# Altium PCB InverterPCB.PcbDoc
Units mm, origin at the board's own origin, x right, y up, seen from the top; angles counter-clockwise.
Board outline 118.77 x 89.69 mm, 2 copper layers (Top Layer, Bottom Layer); 52 components, 27 nets, 177 pads, 46 vias.
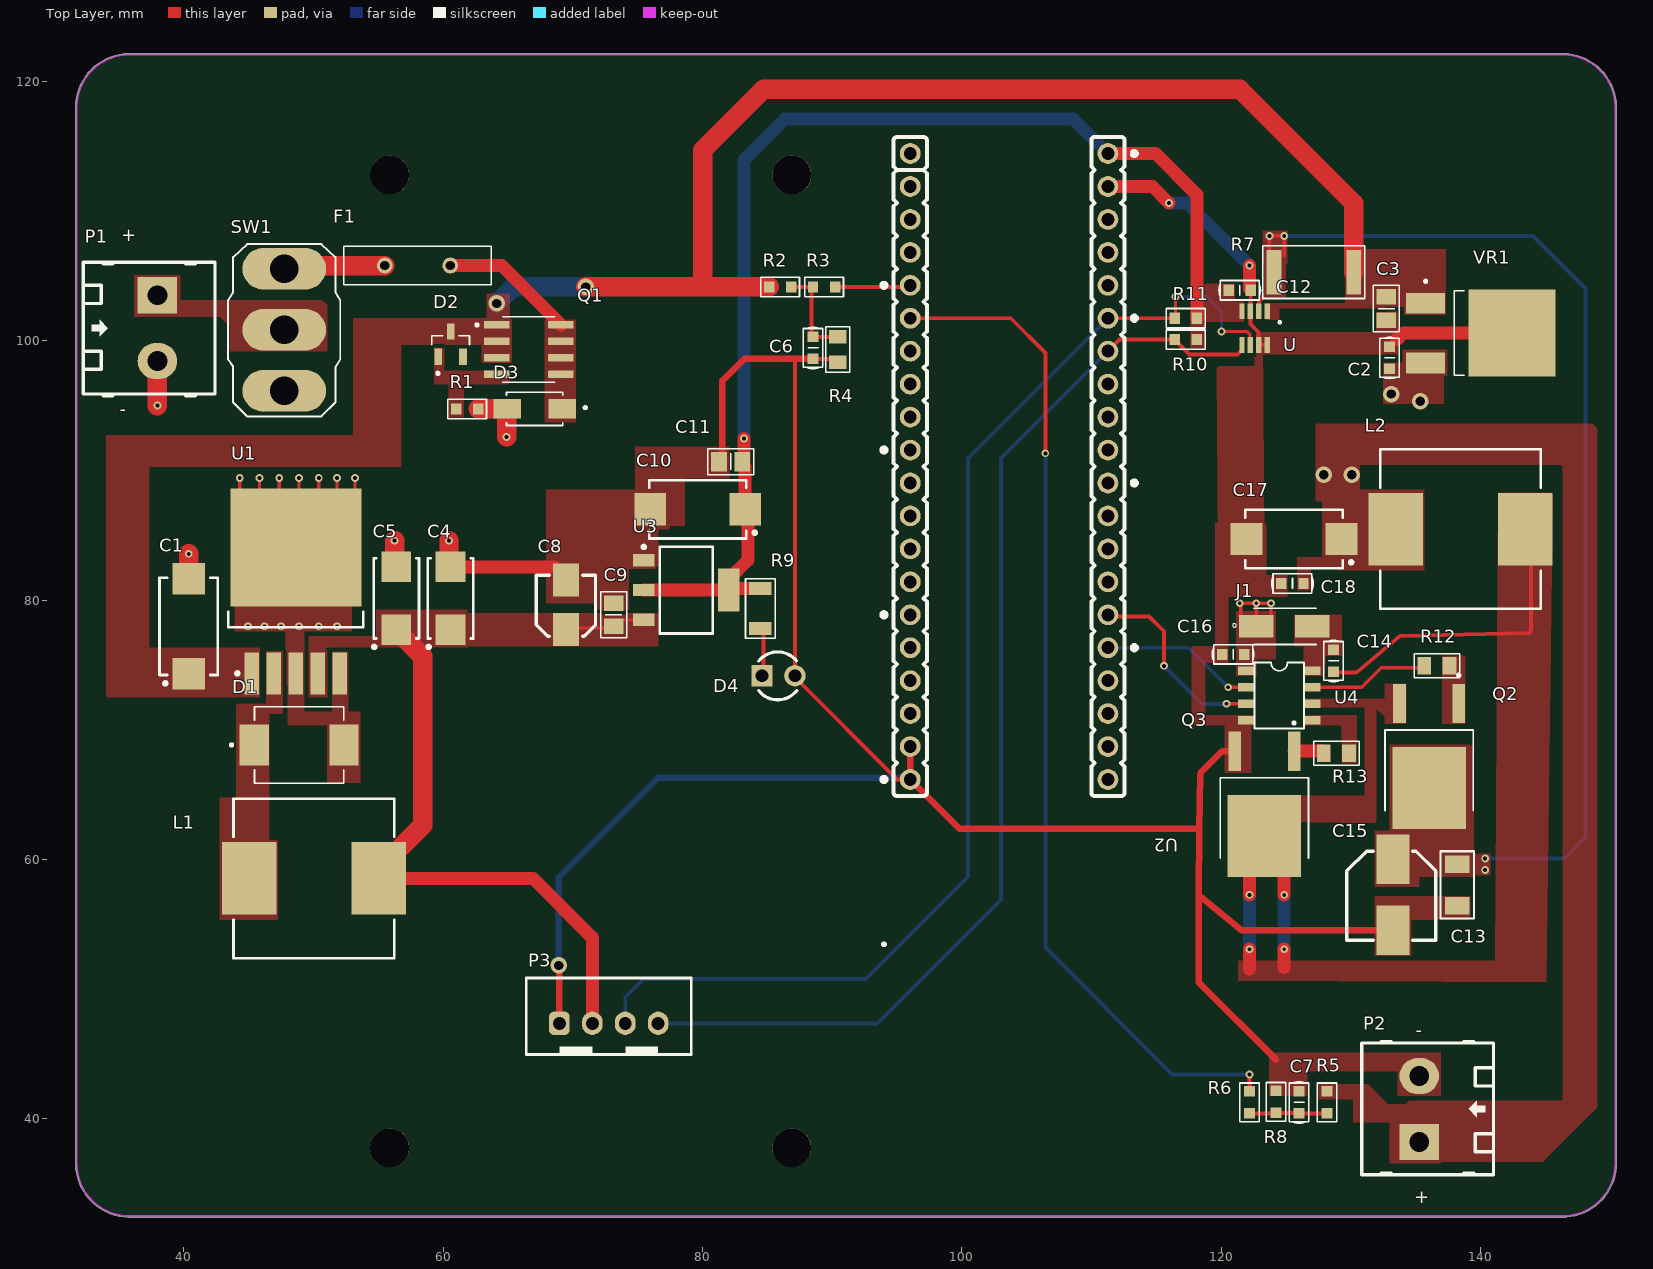
[diagram p0: Top Layer view]
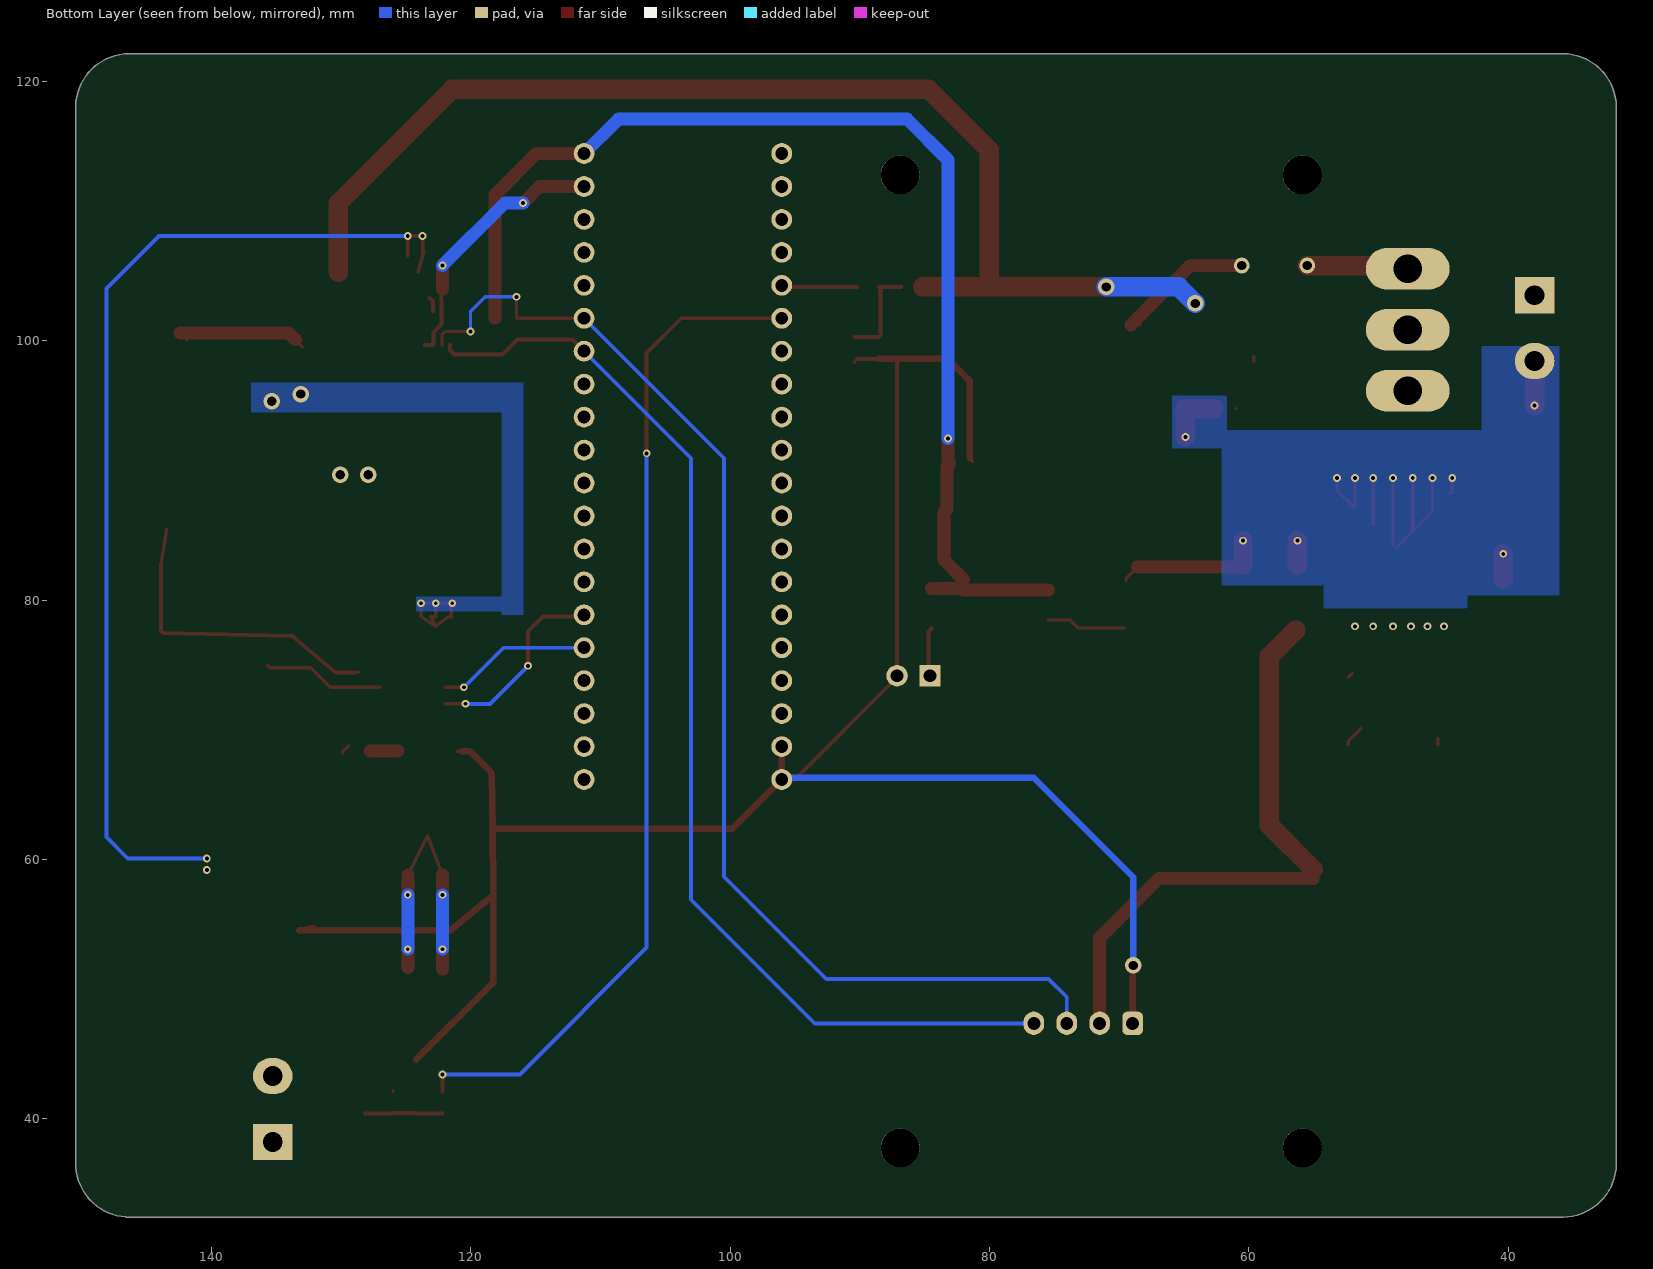
[diagram p1: Bottom Layer view, seen from below]

## Layer stack, top to bottom
Top Solder: solder mask 0.0102, Solder Resist, Dk 3.5
Top Layer: signal copper 0.0356
Dielectric 1: dielectric 0.32, FR-4, Dk 4.8
Bottom Layer: signal copper 0.0356
Bottom Solder: solder mask 0.0102, Solder Resist, Dk 3.5

## Board outline
31.675,36.576 31.675,118.047 31.675,118.048 cw(c35.814,117.983) 35.749,122.122 35.75,122.122 146.304,122.122 146.369,122.122 cw(c146.304,117.983) 150.443,118.048 150.443,117.983 150.443,36.322 150.434,36.285 cw(c146.304,36.576) 146.595,32.446 146.558,32.437 35.814,32.437 35.749,32.437 cw(c35.814,36.576)

## Design rules (kind name [scope] priority, off if disabled: settings)
Clearance [All] p1: gap=0.3 ignorepadtopadclearanceinfootprint=FALSE
PlaneClearance [All] p1: clearance=0.3
PlaneConnect [All] p1: planeconnectstyle=Direct reliefexpansion=0.508 reliefentries=4 reliefconductorwidth=0.254 reliefairgap=0.254
PolygonConnect [All] p1: connectstyle=Direct reliefconductorwidth=0.254 reliefentries=4 polygonreliefangle="90 Angle" airgapwidth=0.254
RoutingVias [All] p1: holewidth=0.711 width=1.27 viastyle="Through Hole" minholewidth=0.711 minwidth=1.27 maxholewidth=0.711 maxwidth=1.27
SolderMaskExpansion [All] p1: expansion=0.102 istentingtop=FALSE
SupplyNets "Schematic Supply Nets" [InNet('GND')] p1: voltage=0.000
Width [All] p1: maxlimit=0.254 minlimit=0.254 preferedwidth=0.254
28 further rules are at their usual default settings.

## Components (designator, comment, footprint, x,y, rotation, side; value= is the part's Value field where it differs from the comment)
C1 "100uF, 50v" "C SMD TAN 2917 (E)" 40.386,77.978 r90 top
C2 "100nF, 50v" "C 0603" 132.969,98.679 r270 top
C3 "0.33uF, 50v" "C 0805" 132.715,102.478 r270 top
C4 "220uF" "C SMD TAN 2312 (C)" 60.579,80.137 r90 top
C5 "220uF" "C SMD TAN 2312 (C)" 56.388,80.137 r90 top
C6 "100nF, 50v" "C 0603" 88.519,99.441 r90 top
C7 "100nF, 50v" "C 0603" 125.984,41.275 r270 top
C8 "10uF" "C SMD ALU (B)" 69.469,79.629 r90 top
C9 "100nF" "C 0805" 73.152,78.867 r90 top
C10 "22uF" "C SMD TAN 2917 (E)" 79.629,86.995 r180 top
C11 "100nF" "C 0805" 82.169,90.678 r180 top
C12 "100nF, 50v" "C 0603" 121.412,103.886 r0 top
C13 "2.2uF, 50v" "C 1206" 138.176,58.039 r90 top
C14 "1uF, 50v" "C 0603" 128.651,75.311 r90 top
C15 "470uF, 35V" "C SMD ALU (D8)" 133.223,57.277 r270 top
C16 "100nF, 50v" "C 0603" 120.904,75.819 r180 top
C17 "330uF, 16V" "C SMD TAN 2917 (E)" 125.603,84.709 r180 top
C18 "100nF, 50v" "C 0603" 125.476,81.28 r0 top
D1 "SS34" DIOM7959X265N 48.895,68.834 r0 top
D2 "BZX84-C12" SOT95P230X110-3N 60.579,99.731 r90 top
D3 "SMAJ28A" DIOM4325X250N 67.056,94.742 r180 top
D4 "Led" "LED 3MM - green" 85.852,74.168 r0 top
F1 "RUEF250" RUEF250 55.499,105.791 r0 top
J1 "SS14" SMA 124.7,77.978 r0 top
L1 "33uH 4.2A" "Inductor SMD 12x12x8" 50.038,58.547 r0 top
L2 "68uH" "Inductor SMD 12x12x8" 138.43,85.471 r180 top
P1 "Header 2" HDR/Terminal/2 37.973,100.965 r270 top
P2 "Header 2" HDR/Terminal/2 135.255,40.767 r90 top
P3 "LCD" HDR/Header/4/BOX 72.771,47.371 r0 top
Q1 "AO4407A" SOIC127P600X175-8N 66.61,99.314 r0 top
Q2 "AOD4184A" DPAK228P994X240-4N 136.017,67.945 r180 top
Q3 "AOD4184A" DPAK228P994X240-4N 123.317,64.262 r180 top
R1 "47k" "R 0603" 61.849,94.742 r180 top
R2 "100k" "R 0603" 85.979,104.14 r0 top
R3 "1k" "R 0603" 89.369,104.14 r0 top
R4 "10k" "R 0805" 90.424,99.314 r270 top
R5 "100k" "R 0603" 128.143,41.275 r270 top
R6 "1k" "R 0603" 122.174,41.275 r90 top
R7 "50mR" "R 2512" 127.127,105.283 r0 top
R8 "10k" "R 0603" 124.206,41.314 r90 top
R9 "4.7k" "R 1206" 84.455,79.349 r90 top
R10 "4.7k" "R 0603" 117.26,100.076 r180 top
R11 "4.7k" "R 0603" 117.26,101.727 r180 top
R12 "10R" "R 0805" 136.611,74.93 r0 top
R13 "10R" "R 0805" 128.864,68.199 r180 top
SW1 "MTS-102" MTS-102 47.752,100.838 r0 top
U "INA219" SOT23-8 122.555,100.965 r180 top
U1 "LM2596S-5.0" TO-263-5 48.641,80.645 r90 top
U2 "STM32F103C8T6 BLUEPILL" "Female header 20x20 pin" 103.632,90.297 r270 top value="Connector 9"
U3 "AMS1117" SOT-223 78.74,80.772 r0 top
U4 "IR2104S" IR2104S 121.92,70.739 r0 top
VR1 "L78M12ABDT" VREG_L78M12ABDT 139.988,100.584 r0 top

## Footprints (in the part's own frame and the unit in brackets; to place one, negate y for a bottom-side part, rotate by r counter-clockwise, add the part's x,y. Pads: shape width x height; smd on the part's side, far side on the other; paste and mask are expansions set on the pad)
"C 0603" [mm] "Chip Capacitor, 2-Leads, Body 1.6x0.8mm, IPC Medium Density"
  rect 0.8x0.85 smd: 1(-0.85,0) 2(0.85,0)
  silkscreen extent -1.6,-0.75 1.6,0.75, body extent -0.8,-0.43 0.8,0.43, height 0.81
"C 0805" [mm] "Chip Capacitor, 2-Leads, Body 2.0x1.3mm, IPC Medium Density"
  rect 1.2x1.5 smd: 1(-0.9,0) 2(0.9,0)
  silkscreen extent -1.78,-1 1.78,1, body extent -1,-0.64 1,0.61, height 0.6
"C 1206" [mm]
  rect 1.35x1.9 smd: 1(-1.6,0) 2(1.6,0)
  silkscreen extent -2.6,-1.3 2.6,1.3, body extent -1.6,-0.8 1.6,0.8, height 0.6
"C SMD ALU (B)" [mil] "SMD Aluminum Electrolytic Capacitor, size D (4.0 x 5.4 mm)"
  rect 100x80 smd: 1(-75,0) 2(75,0)
  silkscreen extent -95,-90 90,90, body extent -91,-85 91,85, height 213
"C SMD ALU (D8)" [mil] "SMD Aluminum Electrolytic Capacitor, size D8 (6.3 x 7.7 mm)"
  rect 150x100 smd: 1(-107.5,0) 2(107.5,0)
  silkscreen extent -132,-140 138,130, body extent -138,-135 138,125, height 303
"C SMD TAN 2312 (C)" [mm] "Molded Capacitor, 2-Leads, Body 6.0x3.2mm, IPC Medium Density"
  rect 2.35x2.3 smd: 1(-2.425,0) 2(2.425,0)
  silkscreen extent -3.87,-1.75 3.1,1.82, body extent -3.09,-1.58 3.09,1.63, height 2.68
"C SMD TAN 2917 (E)" [mm] "Molded Capacitor, 2-Leads, Body 7.3x4.3mm, IPC Medium Density"
  rect 2.45x2.5 smd: 1(-3.66,0) 2(3.66,0)
  silkscreen extent -4.52,-2.25 3.75,2.25, body extent -4.5,-2.3 4.5,2.31, height 3.1
DIOM4325X250N [mm]
  rect 2.12x1.5 smd: A(2.115,0) C(-2.115,0)
  silkscreen extent -4,-1.28 2.16,1.28, body extent -2.57,-1.28 2.57,1.28, height 2.5
DIOM7959X265N [mm]
  rect 2.25x3.18 smd paste+0 mask+0.102: A(3.455,0) C(-3.455,0)
  silkscreen extent -5.3,-2.95 3.44,2.95, body extent 1.05,-3 8.95,2.8, height 2.58
DPAK228P994X240-4N [mm]
  rect 0.97x3.02 smd: 1(-2.286,-4.09) 3(2.286,-4.09)
  rect 5.67x6.32 smd paste-4: 4(0,2.44)
  silkscreen extent -3.4,-6.36 3.4,4.18, body extent -3.3,-5.02 3.3,5.02, height 2.4
"Female header 20x20 pin" [mm] "Connector DIP Male, 9Pin_2.54mm"
  round 1.6 hole 1 mask+0.1: 1(-24.13,-7.62) 2(-21.59,-7.62) 3(-19.05,-7.62) 4(-16.51,-7.62) 5(-13.97,-7.62) 6(-11.43,-7.62) 7(-8.89,-7.62) 8(-6.35,-7.62) 9(-3.81,-7.62) 10(-1.27,-7.62) 11(1.27,-7.62) 12(3.81,-7.62) 13(6.35,-7.62) 14(8.89,-7.62) 15(11.43,-7.62) 16(13.97,-7.62) 17(16.51,-7.62) 18(19.05,-7.62) 19(21.59,-7.62) 20(24.13,-7.62) 21(24.13,7.62) 22(21.59,7.62) 23(19.05,7.62) 24(16.51,7.62) 25(13.97,7.62) 26(11.43,7.62) 27(8.89,7.62) 28(6.35,7.62) 29(3.81,7.62) 30(1.27,7.62) 31(-1.27,7.62) 32(-3.81,7.62) 33(-6.35,7.62) 34(-8.89,7.62) 35(-11.43,7.62) 36(-13.97,7.62) 37(-16.51,7.62) 38(-19.05,7.62) 39(-21.59,7.62) 40(-24.13,7.62)
  silkscreen extent -25.4,-9.75 36.93,9.75, body extent -30.73,-11.63 27.07,11.37, height 20.1
HDR/Header/4/BOX [mm]
  rrect50% 1.6x1.8 hole 1: 1(-3.81,0)
  oval 1.6x1.8 hole 1: 2(-1.27,0) 3(1.27,0) 4(3.81,0)
  silkscreen extent -6.35,-2.41 6.35,3.5, body extent -6.25,-2.3 6.25,3.4, height 7
HDR/Terminal/2 [mil] "Header 2, 2 pin, hight 400mil, Pin to Pin 200mil, Colour Green"
  rect 110x120 hole 60: 1(-100,0)
  oval 110x120 hole 60: 2(100,0)
  silkscreen extent -200,-225 205,175, body extent -229,-218 200,168, height 559
"Inductor SMD 12x12x8" [mm] "Precision Wire Wound Inductor, 2-Leads, Body 12.3x12.3mm, IPC Low Density"
  rect 4.2x5.6 smd: 1(-5,0) 2(5,0)
  silkscreen extent -6.2,-6.15 6.2,6.15, body extent -6.25,-6.25 6.25,6.25, height 8.01
IR2104S [mm]
  rect 1.27x0.635 smd: 1(0,3.81) 2(0,2.54) 3(0,1.27) 4(0,0) 5(5.08,0) 6(5.08,1.27) 7(5.08,2.54) 8(5.08,3.81)
  silkscreen extent 0.64,-0.64 4.44,4.44
"LED 3MM - green" [mil]
  rect 65x65 hole 39: 1(-50,0)
  round 65 hole 39: 2(50,0)
  silkscreen extent -60,-73 55,72, body extent -66,-65 64,65, height 207
MTS-102 [mm]
  oval 6.432x3.216 hole 2.2: 1(0,4.7) 2(0,0) 3(0,-4.7)
  silkscreen extent -4.32,-6.68 4.32,6.6
"R 0603" [mm] "Chip Resistor, 2-Leads, Body 1.6x0.8mm, IPC Medium Density"
  rect 0.8x0.85 smd: 1(-0.85,0) 2(0.85,0)
  silkscreen extent -1.5,-0.75 1.5,0.75, body extent -0.8,-0.4 0.8,0.4, height 0.5
"R 0805" [mm] "Chip Resistor, 2-Leads, Body 2.0x1.3mm, IPC Medium Density"
  rect 1.05x1.35 smd: 1(-0.975,0) 2(0.975,0)
  silkscreen extent -1.75,-0.92 1.75,0.92, body extent -1,-0.61 1,0.59, height 0.5
"R 1206" [mm] "Chip Resistor, 2-Leads, Body 3.1x1.6mm, IPC Medium Density"
  rect 1x1.75 smd: 1(-1.55,0) 2(1.55,0)
  silkscreen extent -2.29,-1.14 2.29,1.14, body extent -1.6,-0.8 1.6,0.8, height 0.6
"R 2512" [mm] "Chip Resistor, 2-Leads, Body 6.4x3.2mm, IPC Medium Density"
  rect 1.15x3.45 smd: 1(-3.075,0) 2(3.075,0)
  silkscreen extent -3.94,-2.03 3.94,2.03, body extent -3.2,-1.6 3.2,1.6, height 0.76
RUEF250 [mm]
  round 1.217 hole 0.71: 1(0,0) 2(5.05,0)
  silkscreen extent -3.17,-1.5 8.23,1.5
SMA [mm]
  rect 2.65x1.75 smd paste+0 mask+0.102: P1(-2,0) P2(2.3,0)
  silkscreen extent -3.84,-1.4 2.6,1.4, body extent -2.6,-1.36 2.6,1.36, height 2.5
SOIC127P600X175-8N [mm]
  rrect25% 1.97x0.6 smd: 1(-2.475,1.905) 2(-2.475,0.635) 3(-2.475,-0.635) 4(-2.475,-1.905) 5(2.475,-1.905) 6(2.475,-0.635) 7(2.475,0.635) 8(2.475,1.905)
  silkscreen extent -4.1,-2.52 2,2.52, body extent -3,-2.45 3,2.45, height 1.75
SOT23-8 [mm]
  rect 0.4x1.2 smd: 1(-0.975,-1.3) 2(-0.325,-1.3) 3(0.325,-1.3) 4(0.975,-1.3) 5(0.975,1.3) 6(0.325,1.3) 7(-0.325,1.3) 8(-0.975,1.3)
  silkscreen extent -2.05,-0.55 -1.85,-0.35
SOT95P230X110-3N [mm]
  rect 1.26x0.59 smd: 1(-0.98,0.95) 2(-0.98,-0.95) 3(0.98,0)
  silkscreen extent -2.35,-1.45 0.65,1.45
SOT-223 [mm] "SOT223, 4-Leads, Body 6.7x7.3mm (max), Pitch 2.30mm, IPC Medium Density"
  rect 1.65x0.95 smd: 1(-3.275,2.3) 2(-3.275,0) 3(-3.275,-2.3)
  rect 1.65x3.3 smd: 4(3.275,0)
  silkscreen extent -3.4,-3.35 2.05,3.45, body extent -3.5,-3.25 3.5,3.25, height 1.64
TO-263-5 [mm] "D2-PAK, 6-Pads, Body 8.9x10.4mm (max), IPC Medium Density"
  rect 3.25x1.1 smd: 1(-6.3,3.4) 2(-6.3,1.7) 3(-6.3,0) 4(-6.3,-1.7) 5(-6.3,-3.4)
  rect 9.1x10.1 smd: 6(3.4,0)
  silkscreen extent -6.42,-5.2 -1.55,5.2, body extent -7.56,-4.98 8.11,5.02, height 4.83
VREG_L78M12ABDT [mm]
  rect 3x1.6 smd: 1(-4.25,2.3) 3(-4.25,-2.3)
  rect 6.7x6.7 smd paste-2.645: 2(2.4,0)
  silkscreen extent -4.35,-3.25 -1.26,4.1, body extent -4.86,-3.25 4.86,3.25, height 2.4

## Part data
C1 C4 C5 C8 C10 C15 C17: library part Capacitor, "Capacitor pol"
C2 C3 C6 C7 C9 C11 C12 C13 C14 C16 C18: library part "Capacitor NP", "Capacitor non-pol"
D1: "Diode Schottky 40 V 3A Surface Mount SMC (DO-214AB)", PACKAGE="SMC-2 ON Semiconductor", Check_prices=https://www.snapeda.com/parts/SS34/Onsemi/view-part/?ref=eda, MF=onsemi, MP=SS34, SnapEDA_Link=https://www.snapeda.com/parts/SS34/Onsemi/view-part/?ref=snap
D2: "Zener Diode 12 V 250 mW Â±5% Surface Mount TO-236AB", PACKAGE="SOT-23 NXP Semiconductors", Check_prices=https://www.snapeda.com/parts/BZX84-C12/Nexperia/view-part/?ref=eda, MF="Nexperia USA", MP=BZX84-C12, SnapEDA_Link=https://www.snapeda.com/parts/BZX84-C12/Nexperia/view-part/?ref=snap
D3: "400W, 32.8V, 5%, Unidirectional, TVS", PACKAGE="SMA-2 Taiwan Semiconductor", Check_prices=https://www.snapeda.com/parts/SMAJ28A/taiwan/view-part/?ref=eda, MF="Taiwan Semiconductor", MP=SMAJ28A, SnapEDA_Link=https://www.snapeda.com/parts/SMAJ28A/taiwan/view-part/?ref=snap
D4: "Typical LED"
F1: "Littelfuse 2.5A Radial Leaded PCB Mount Resettable Fuse, 30V dc", Manufacturer_Name=LITTELFUSE, Mouser Part Number=650-RUEF250, Arrow Part Number=RUEF250, Arrow Price/Stock=https://www.arrow.com/en/products/ruef250/littelfuse?utm_currency=USD&region=europe, Datasheet Link=https://www.littelfuse.com/~/media/electronics/product_specifications/resettable_ptcs/littelfuse_ptc_ruef250_product_specification.pdf.pdf, Geometry.Height=18.3mm, Manufacturer_Part_Number=RUEF250, Mouser Price/Stock=https://www.mouser.co.uk/ProductDetail/Littelfuse/RUEF250?qs=hv6pn79dJPQsHwuAgSfH9w%3D%3D
J1: "Diode Schottky 40 V 1A Surface Mount DO-214AC (SMA)", PACKAGE="SMA-2 ON Semiconductor", Check_prices=https://www.snapeda.com/parts/SS14/Onsemi/view-part/?ref=eda, MF=ON, MP=SS14, SnapEDA_Link=https://www.snapeda.com/parts/SS14/Onsemi/view-part/?ref=snap
L1 L2: library part Inductor, "Inductor"
P1 P2: "Header, 2-Pin"
P3: library part "Header 4", "Header, 4-Pin"
Q1: "P-Channel 30 V 12A (Ta) 3.1W (Ta) Surface Mount 8-SOIC", PACKAGE="SOIC-8 Alpha &amp; Omega Semiconductor", Check_prices=https://www.snapeda.com/parts/AO4407A/Alpha/view-part/?ref=eda, MF="Alpha &", MP=AO4407A, SnapEDA_Link=https://www.snapeda.com/parts/AO4407A/Alpha/view-part/?ref=snap
Q2 Q3: "N-Channel 40 V 13A (Ta), 50A (Tc) 2.3W (Ta), 50W (Tc) Surface Mount TO-252 (DPAK)", PACKAGE=None, Check_prices=https://www.snapeda.com/parts/AOD4184A/Alpha+%2526+Omega+Semiconductor+Inc./view-part/?ref=eda, MF="Alpha & Omega Semiconductor Inc.", MP=AOD4184A, SnapEDA_Link=https://www.snapeda.com/parts/AOD4184A/Alpha+%2526+Omega+Semiconductor+Inc./view-part/?ref=snap
R1 R2 R3 R4 R5 R6 R7 R8 R9 R10 R11 R12 R13: library part Resistor, "Resistor"
SW1: "Rectangular Cable Assemblies .100 Mini Mate Single Row Discrete Wire Cable Assembly, Terminal", PACKAGE=None, Availability=Unavailable, Check_prices=https://www.snapeda.com/parts/MTS102/Motorola/view-part/698799/?ref=eda, MF=Motorola, MP=MTS102, Price=None, SnapEDA_Link=https://www.snapeda.com/parts/MTS102/Motorola/view-part/698799/?ref=snap
U: "Current Monitor Regulator High-Side 10mA SOT-23-8", PACKAGE="SOT-23-8 Texas Instruments", Availability=Unavailable, MF="Texas Instruments", MP=INA219, Price=None, SnapEDA_Link=https://www.snapeda.com/parts/INA219/Texas%20Instruments/view-part/564410/?ref=snap
U1: "Simple Switcher 3A Step-Down Voltage Regulator"
U2: library part "STM32F103C8T6 KIT BLUE PILL", "Connector 9"
U3: "1A LDO Voltage Regulator, ADJ or fixed 1.5/1.8/2.5/2.85/3.3/5V"
U4: "Half-Bridge Gate Driver IC Non-Inverting 8-SOIC", PACKAGE="SO-8 Infineon", Availability=Unavailable, MF="Infineon Technologies", MP=IR2104S, Price=None, SnapEDA_Link=https://www.snapeda.com/parts/IR2104S/Infineon%20Technologies/view-part/582439/?ref=snap
VR1: "Linear Voltage Regulator IC Positive Fixed 1 Output 500mA DPAK", PACKAGE="TO-252 STMicroelectronics", Availability="Not in stock", Check_prices=https://www.snapeda.com/parts/L78M12ABDT/STMicroelectronics/view-part/?ref=eda, MF=STMicroelectronics, MP=L78M12ABDT, Price=None, SnapEDA_Link=https://www.snapeda.com/parts/L78M12ABDT/STMicroelectronics/view-part/?ref=snap

## Free pads (board coordinates)
  round 3 hole 3 unplated mask+0.07: 2(55.88,37.776) 2(55.88,112.776) 2(86.88,37.776) 2(86.88,112.776)

## Via types
v1: diameter 0.6, hole 0.3, Top Layer to Bottom Layer, 39 vias
v2: diameter 1.27, hole 0.711, Top Layer to Bottom Layer, 7 vias

## Nets (pads, with @x,y where several pads share a name; then routed paths per layer and width w, separated by ;. In a path a pad name is that pad's centre, name@x,y a point inside that pad or via, vN(x,y) a via of type N, cw(c..) or ccw(c..) an arc to the next point about the centre after c; other vN are vias at no path point)
3.3V: C10.1 C11.1 C12.1 R9.2 R10.1 R11.1 U2.40 U3.2 U3.4 U.4 | length 91.1
  Top Layer w0.254: U3.4 U3.4@82.015,81.597 ; C11.1 C11.1@83.185,90.794
  Top Layer w1: U3.2 U3.4 82.142,80.899 R9.2 ; U3.4@82.015,81.597 83.509,83.091 83.509,86.775 C10.1 83.289,90.308 C11.1@83.069,90.528 ; C11.1@83.185,90.794 v1(83.185,92.456) ; U2.40 114.935,114.427 118.11,111.252 R11.1
  Bottom Layer w1: v1(83.185,92.456) 83.185,113.919 86.36,117.094 108.585,117.094 U2.40
5V: C4.1 C5.1 C8.1 C9.1 L1.2 P3.2 U1.4 U3.3 | length 51.8
  Top Layer w0.254: C5.1@56.388,77.687 C5.1 ; C8.1@69.596,77.851 73.186,77.851 73.807,78.472 U3.3
  Top Layer w1: L1.2 66.929,58.547 71.501,53.975 P3.2
  Top Layer w1.5: L1.2@55.038,59.247 58.42,62.629 58.42,75.655 C5.1@56.388,77.687
12V: C2.2 C16.1 J1.P1 U4.1 VR1.3 | length 9.5
  Top Layer w0.254: v1(122.682,79.756) 122.682,78.726 123.063,78.726 J1.P1 ; v1(122.682,79.756) v1(121.412,79.756) 121.412,79.662 121.502,79.572 121.502,78.726 121.666,78.726 J1.P1 ; v1(122.682,79.756) v1(123.825,79.756) 123.825,78.726 J1.P1
  other v2: 135.33,95.325 133.096,95.885
Batt: C17.1 C18.2 L2.2 P2.1 R5.1 | length 0.1
  Top Layer w0.254: P2.1@135.128,38.227 P2.1
  other v2: 127.889,89.662 130.048,89.662
GND: C1.2 C2.1 C3.2 C4.2 C5.2 C6.1 C7.1 C8.2 C9.2 C10.2 C11.2 C12.2 C13.1 C15.2 C16.2 C17.2 C18.1 D1.A D3.A D4.2 P1.2 P2.2 P3.1 Q3.3 R1.1 R4.2 R8.2 U1.3 U1.5 U1.6 U2.19 U2.20 U2.39 U3.1 U4.4 U.3 U.7 U.8 VR1.2 | length 248.9
  Top Layer w0.254: v1(44.323,89.408) 44.323,88.363 U1.6@44.499,88.187 ; v1(45.847,89.408) 45.847,86.839 U1.6 47.371,85.315 v1(47.371,89.408) ; U1.6@48.895,84.299 v1(48.895,89.408) ; U1.6@50.419,85.823 v1(50.419,89.408) ; D1.A@51.352,70.104 52.35,69.106 D1.A ; U1.6@51.816,87.22 v1(51.816,89.408) ; U1.6@51.891,87.146 53.213,88.468 v1(53.213,89.408) ; U1.5 U1.5@52.35,74.036 ; C5.2@56.261,82.689 C5.2 ; C8.2@68.58,82.562 69.469,81.673 C8.2 ; v2(68.915,51.834) v2@68.961,51.788 ; C11.2 C11.2@81.534,90.943 ; R4.2@90.172,98.591 R4.2 ; 118.363,66.573 cw(c118.617,66.568) 118.436,66.747 ; 119.943,68.254 cw(c120.123,68.075) 120.123,68.329 ; Q3.3@120.673,68.329 Q3.3 ; C12.2@122.174,103.974 C12.2 ; U.7@122.862,99.683 U.7 ; C7.1@125.945,42.164 C7.1 ; C15.2@132.08,54.864 C15.2 ; C2.1 132.994,99.529 133.267,99.802 133.267,99.827 133.516,100.076 ; VR1.2@141.88,100.076 VR1.2
  Top Layer w0.3: D4.2 87.122,98.591 ; D4.2@87.266,73.897 94.996,66.167 U2.20 ; C6.1 R4.2@90.172,98.591 ; U.3 122.23,101.278 122.862,100.646 U.7@122.862,99.683 ; U.3@122.253,102.288 122.253,103.071 122.262,103.08 C12.2 ; U.7 U.8
  Top Layer w0.5: P3.1 v2@68.961,51.788 ; C11.2@81.534,90.943 81.534,96.901 83.224,98.591 87.122,98.591 C6.1 ; U2.19 U2.20 99.823,62.356 118.306,62.356 ; 118.331,57.199 121.542,54.546 C15.2 ; 118.363,66.572 118.306,62.356 ; 118.436,66.747 119.943,68.254 ; 120.123,68.329 Q3.3@120.673,68.329 ; 124.206,44.577 118.239,50.544 118.239,57.399 118.306,62.356
  Top Layer w1: C4.2 C8.2@68.58,82.562 ; U2.39 114.681,111.887 v1(115.951,110.617) ; C12.2@122.174,103.974 v1(122.174,105.791) ; 133.516,100.076 134.024,100.584 VR1.2
  Top Layer w1.5: v1(37.973,94.996) P1.2 ; C1.2 v1(40.386,83.566) ; C5.2@56.261,82.689 v1(56.261,84.582) ; C4.2@60.452,82.689 v1(60.452,84.582) ; R1.1 D3.A ; v1(64.897,92.583) D3.A@64.897,94.698
  Bottom Layer w0.5: v2(68.915,51.834) 68.915,58.628 76.581,66.294 U2.20@95.885,66.294
  Bottom Layer w1: v1(115.951,110.617) 117.348,110.617 v1(122.174,105.791)
  other v1: 44.958,77.978 46.228,77.978 47.498,77.978 48.895,77.978 50.419,77.978 51.816,77.978
NetC6_2: C6.2 R2.2 R3.1 R4.1 | length 7.6
  Top Layer w0.3: R2.2 88.392,104.14 R3.1 88.392,104.013 88.392,100.418 88.521,100.289 R4.1
NetC7_2: C7.2 R5.2 R6.1 R8.1 | length 6
  Top Layer w0.254: R8.1@124.167,40.425 R8.1 ; C7.2@125.945,40.464 C7.2
  Top Layer w0.3: R6.1 R8.1@124.167,40.425 ; R8.1 C7.2@125.945,40.464 ; C7.2 R5.2
NetC14_1: C14.1 L2.1 Q2.3 Q3.4 U4.6 | length 45.1
  Top Layer w0.254: Q3.4@122.174,58.789 Q3.4 Q3.4@124.841,58.789 ; C14.1 C14.1@128.949,74.422 ; 130.336,74.422 ccw(c130.336,74.676) 130.5,74.482 ; 133.663,77.159 cw(c133.827,76.964) 133.82,77.218 ; L2.1 L2.1@143.876,82.798
  Top Layer w0.3: C14.1@128.949,74.422 130.336,74.422 ; 130.5,74.482 133.663,77.158 ; 133.82,77.218 143.629,77.463 ; 143.63,77.463 ccw(c143.622,77.717) 143.876,77.717 L2.1@143.876,82.798
  Top Layer w1: 122.174,51.562 v1(122.174,53.086) ; v1(122.174,57.277) Q3.4@122.174,58.789 ; 124.841,51.689 v1(124.841,53.086) ; v1(124.841,57.277) Q3.4@124.841,58.789
  Bottom Layer w1: v1(122.174,53.086) v1(122.174,57.277) ; v1(124.841,53.086) v1(124.841,57.277)
NetC14_2: C14.2 J1.P2 U4.8
NetD1_C: D1.C L1.1 U1.2 | length 0.5
  Top Layer w0.254: D1.C D1.C@45.44,69.299
NetD2_1: D2.1 Q1.4 R1.2 | length 0.4
  Top Layer w0.254: D2.1@59.629,98.416 D2.1 ; R1.2 R1.2@60.999,94.767
NetD3_C: D3.C F1.2 Q1.5 Q1.6 Q1.7 Q1.8 | length 11.1
  Top Layer w0.254: Q1.8@68.4,101.219 Q1.8
  Top Layer w1: F1.2 64.513,105.791 Q1.8
NetD4_1: D4.1 R9.1 | length 3.4
  Top Layer w0.3: R9.1 84.709,77.545 D4.1@84.709,74.549
NetF1_1: F1.1 SW1.1 | length 7.9
  Top Layer w1.5: SW1.1 48.005,105.791 F1.1
NetQ2_1: Q2.1 R12.2
NetQ3_1: Q3.1 R13.2 | length 2.1
  Top Layer w1: Q3.1 R13.2@127.736,68.352
NetR12_1: R12.1 U4.7 | length 9.3
  Top Layer w0.254: R12.1@135.486,74.78 R12.1
  Top Layer w0.3: U4.7 130.821,73.279 132.322,74.78 R12.1@135.486,74.78
NetR13_1: R13.1 U4.5 | length 0.7
  Top Layer w0.254: R13.1@129.441,68.747 129.839,68.349 R13.1
PB6: P3.4 R10.2 U2.34 U.5 | length 87.8
  Top Layer w0.254: R10.2@116.41,100.051 R10.2
  Top Layer w0.3: U2.34 112.141,100.076 R10.2 ; R10.2@116.41,100.051 117.528,98.933 121.248,98.933 121.58,99.265 U.5
  Bottom Layer w0.3: P3.4 93.472,47.371 102.997,56.896 102.997,90.932 U2.34
PB7: P3.3 R11.2 U2.35 U.6 | length 95.3
  Top Layer w0.254: R11.2 116.459,102.025 v1(116.459,103.378) ; v1(120.015,100.711) 121.938,100.711 122.207,100.442 122.207,99.688 U.6
  Top Layer w0.3: U2.35 R11.2
  Bottom Layer w0.254: v1(116.459,103.378) 118.872,103.378 120.015,102.235 v1(120.015,100.711)
  Bottom Layer w0.3: P3.3 74.041,49.403 75.438,50.8 92.583,50.8 100.457,58.674 100.457,90.932 U2.35
PWM_IN: U2.25 U4.2 | length 11.9
  Top Layer w0.3: v1(120.523,73.279) U4.2
  Bottom Layer w0.3: U2.25 117.475,76.327 v1(120.523,73.279)
Shut_Down: U2.26 U4.3 | length 15.1
  Top Layer w0.254: U2.26 U2.26@111.379,78.74
  Top Layer w0.3: U2.26@111.379,78.74 114.427,78.74 115.57,77.597 v1(115.57,74.93) ; v1(120.396,72.009) U4.3
  Bottom Layer w0.254: v1@120.378,71.991 v1(120.396,72.009)
  Bottom Layer w0.3: v1(115.57,74.93) 118.509,71.991 v1@120.378,71.991
V_Batt_SENSE: R6.2 U2.6 | length 78.5
  Top Layer w0.3: U2.6 103.759,101.727 106.426,99.06 v1(106.426,91.313) ; R6.2 v1(122.174,43.434)
  Bottom Layer w0.3: v1(106.426,91.313) 106.426,53.213 116.205,43.434 v1(122.174,43.434)
V_Buck_IN: C13.2 C15.1 Q2.4 R7.1 U.2 | length 82.4
  Top Layer w0.254: U.2 U.2@122.903,102.288 ; 123.153,103.292 123.19,103.292 ; R7.1 123.604,106.881 123.698,106.881 v1(123.698,108.077) v1(124.841,108.077) 124.841,106.553
  Top Layer w0.3: U.2@122.903,102.288 122.903,103.042 123.153,103.292
  Bottom Layer w0.3: v1(124.841,108.077) 144.018,108.077 148.082,104.013 148.082,61.722 146.431,60.071 v1(140.335,60.071)
  other v1: 140.335,59.182
V_PV: C1.1 C3.1 D2.3 Q1.1 Q1.2 Q1.3 R2.1 R7.2 U1.1 U.1 VR1.1 | length 93.1
  Top Layer w1.5: v2(70.993,104.14) 80.01,104.14 ; R2.1 80.01,104.14 ; R7.2 130.202,110.59 121.412,119.38 84.709,119.38 80.01,114.681 80.01,104.14
  Bottom Layer w1.5: v2(64.135,102.87) 65.405,104.14 v2(70.993,104.14)
V_PV_SENSE: R3.2 U2.5 | length 5.8
  Top Layer w0.3: R3.2 95.885,104.14 U2.5
Vpv: P1.1 SW1.2 | length 1.6
  Top Layer w0.254: SW1.2@46.144,100.838 SW1.2
pads on no net: D2.2 SW1.3 U2.1 U2.2 U2.3 U2.4 U2.7 U2.8 U2.9 U2.10 U2.11 U2.12 U2.13 U2.14 U2.15 U2.16 U2.17 U2.18 U2.21 U2.22 U2.23 U2.24 U2.27 U2.28 U2.29 U2.30 U2.31 U2.32 U2.33 U2.36 U2.37 U2.38

## Polygon pours and split planes (outlines as drawn)
12V on Bottom Layer "12V_L02_P041" (solid, remove dead copper, pour order 41): 124.206,80.264 124.206,79.121 115.951,79.121 115.951,80.264 121.666,80.264
12V on Bottom Layer "12V_L02_P039" (solid, remove dead copper, pour order 39): 136.906,96.774 136.906,94.488 117.602,94.488 117.602,78.867 115.951,78.867 115.951,96.774 133.096,96.774
GND on Bottom Layer "GND_L02_P000" (solid, remove dead copper, pour order 0): 43.18,80.391 43.18,79.248 43.307,79.375 54.229,79.375 54.229,81.28 54.356,81.153 62.103,81.153 62.103,91.694 65.913,91.694 65.913,95.758 61.849,95.758 61.722,95.631 61.722,93.091 42.037,93.091 42.037,99.568 36.068,99.568 36.068,80.391
V_PV on Top Layer "V_PV_L01_P013" (solid, remove dead copper, pour order 13): 60.706,101.727 53.086,101.727 53.086,92.71 34.036,92.71 34.036,72.39 34.163,72.517 42.481,72.517 42.481,76.327 37.338,76.327 37.338,90.297 56.769,90.297 56.769,99.695 60.706,99.695
5V on Top Layer "5V_L01_P005" (solid, remove dead copper, pour order 5): 51.054,72.517 51.054,76.073 50.927,76.2 50.927,76.327 61.849,76.327 61.849,79.248 54.864,79.248 54.864,77.216 49.657,77.216 49.657,72.517 49.911,72.517
Batt on Top Layer "BATT_L01_P048" (solid, remove dead copper, pour order 48): 127.254,90.424 127.254,93.599 148.59,93.599 148.971,93.218 148.971,40.894 144.78,36.703 133.731,36.703 133.731,40.64 134.493,41.402 146.304,41.402 146.304,90.297 146.177,90.424
Batt on Top Layer "BATT_L01_P047" (solid, remove dead copper, pour order 47): 127.254,90.424 130.683,90.424 130.683,87.63 127.254,87.63
GND on Top Layer "GND_L01_P046" (solid, remove dead copper, pour order 46): 133.604,41.783 136.906,41.783 136.906,45.085 123.698,45.085 123.698,41.783 126.619,41.783 126.619,43.561 126.746,43.688 133.604,43.688
Batt on Top Layer "BATT_L01_P045" (solid, remove dead copper, pour order 45): 127.508,42.672 131.318,42.672 132.842,41.148 136.906,41.148 136.906,36.576 132.969,36.576 132.969,39.624 132.842,39.751 130.175,39.751 130.175,41.529 127.508,41.529
V_Buck_IN on Top Layer "V_BUCK_IN_L01_P044" (solid, remove dead copper, pour order 44): 138.303,60.452 140.716,60.452 140.716,58.801 138.303,58.801
V_Buck_IN on Top Layer "V_BUCK_IN_L01_P043" (solid, remove dead copper, pour order 43): 123.19,108.458 125.095,108.458 125.095,105.918 123.19,105.918
GND on Top Layer "GND_L01_P026" (solid, remove dead copper, pour order 26): 119.507,75.184 120.523,75.184 120.523,80.264 121.539,80.264 121.539,85.979 119.507,85.979
GND on Top Layer "GND_L01_P040" (solid, remove dead copper, pour order 40): 119.761,83.947 123.317,83.947 123.19,100.584 122.555,100.584 122.555,98.044 119.63,98.044
12V on Top Layer "12V_L01_P038" (solid, remove dead copper, pour order 38): 132.461,98.298 132.461,95.123 137.16,95.123 137.16,98.298
NetC14_1 on Top Layer "NETC14_1_L01_P037" (solid, remove dead copper, pour order 37): 141.351,88.265 145.542,88.265 145.034,50.546 121.285,50.673 121.285,52.197 141.097,52.197
NetC14_1 on Top Layer "NETC14_1_L01_P035" (solid, remove dead copper, pour order 35): 131.953,62.799 131.953,72.39 131.064,72.39 131.064,64.897 124.333,64.897 124.333,63.373 124.333,64.897 124.333,62.926
NetC14_2 on Top Layer "NETC14_2_L01_P034" (solid, remove dead copper, pour order 34): 125.603,78.867 129.286,78.867 129.286,75.692 128.016,75.692 128.016,74.168 126.365,74.168 126.365,76.454 125.603,76.454
NetC14_1 on Top Layer "NETC14_1_L01_P033" (solid, remove dead copper, pour order 33): 134.239,73.533 134.239,70.485 132.588,70.485 132.588,70.993 131.826,71.755 126.365,71.755 126.365,72.39 132.588,72.39 132.588,73.533
NetQ2_1 on Top Layer "NETQ2_1_L01_P032" (solid, remove dead copper, pour order 32): 137.033,75.692 138.811,75.692 138.811,70.485 137.033,70.485
NetR13_1 on Top Layer "NETR13_1_L01_P031" (solid, remove dead copper, pour order 31): 126.365,71.12 130.429,71.12 130.429,67.437 129.286,67.437 129.286,70.231 129.159,70.358 126.365,70.358
GND on Top Layer "GND_L01_P030" (solid, remove dead copper, pour order 30): 139.192,57.15 131.826,57.15 131.826,52.578 134.62,52.578 134.62,55.372 138.938,55.372 139.192,55.626
V_Buck_IN on Top Layer "V_BUCK_IN_L01_P029" (solid, remove dead copper, pour order 29): 132.969,68.834 139.192,68.834 139.446,68.58 139.446,58.674 135.255,58.674 135.255,57.912 131.826,57.912 131.826,62.23 132.969,62.23
GND on Top Layer "GND_L01_P028" (solid, remove dead copper, pour order 28): 122.301,66.675 120.269,66.675 120.269,71.12 122.301,71.12 120.269,71.12 122.301,71.12
GND on Top Layer "GND_L01_P027" (solid, remove dead copper, pour order 27): 120.523,75.184 120.523,76.454 117.729,76.454 117.729,70.358 122.555,70.358 122.555,71.12 118.745,71.12 118.745,75.184
GND on Top Layer "GND_L01_P025" (solid, remove dead copper, pour order 25): 120.65,85.979 123.317,85.979 123.444,85.852 123.444,81.915 125.095,81.915 125.095,80.264 120.65,80.264
12V on Top Layer "12V_L01_P023" (solid, remove dead copper, pour order 23): 121.158,79.121 124.206,79.121 124.206,75.438 122.682,75.438 122.682,74.168 121.158,74.168
Batt on Top Layer "BATT_L01_P024" (solid, remove dead copper, pour order 24): 135.636,88.519 127.762,88.519 127.762,83.312 125.857,83.312 125.857,80.772 126.873,80.772 126.873,82.55 128.778,82.55 129.032,82.296 135.636,82.296 129.032,82.296 135.636,82.296
12V on Top Layer "12V_L01_P022" (solid, remove dead copper, pour order 22): 132.461,98.298 133.985,98.298 133.985,99.314 137.414,99.314 137.414,97.282 132.461,97.282
GND on Top Layer "GND_L01_P021" (solid, remove dead copper, pour order 21): 131.953,102.235 133.731,102.235 133.604,102.108 133.604,98.933 122.682,98.933 122.682,100.646 131.888,100.646 131.953,100.711
V_PV on Top Layer "V_PV_L01_P020" (solid, remove dead copper, pour order 20): 123.317,102.87 129.54,102.87 129.54,104.648 132.588,104.648 132.588,102.489 124.46,102.489 124.46,101.6 123.444,101.6 123.317,101.727
V_PV on Top Layer "V_PV_L01_P019" (solid, remove dead copper, pour order 19): 129.54,107.061 137.287,107.061 137.287,101.981 134.112,101.981 134.112,102.616 131.699,102.616 131.699,103.505 129.54,103.505
V_Buck_IN on Top Layer "V_BUCK_IN_L01_P018" (solid, remove dead copper, pour order 18): 122.682,101.6 123.19,101.6 123.19,103.251 124.968,103.251 124.968,107.188 123.317,107.188 123.317,103.632 122.936,103.632 122.936,102.997 122.682,102.997
3.3V on Top Layer "3.3V_L01_P017" (solid, remove dead copper, pour order 17): 117.602,102.235 118.618,102.235 118.618,104.394 118.745,104.521 118.872,104.394 121.031,104.394 121.031,102.997 121.92,102.997 121.92,101.473 118.745,101.473 118.745,99.441 117.602,99.441
GND on Top Layer "GND_L01_P016" (solid, remove dead copper, pour order 16): 78.613,85.725 78.613,89.408 82.042,89.408 82.042,91.821 74.803,91.821 74.803,85.725
GND on Top Layer "GND_L01_P015" (solid, remove dead copper, pour order 15): 71.628,79.756 71.755,79.629 71.755,79.121 74.075,79.121 74.202,78.994 74.295,79.087 74.295,82.423 76.327,82.423 76.581,82.677 76.581,85.471 77.343,85.471 77.47,85.598 77.47,88.519 67.945,88.519 67.945,79.756 67.945,88.519 67.945,79.756
5V on Top Layer "5V_L01_P014" (solid, remove dead copper, pour order 14): 76.581,78.994 76.581,76.454 58.801,76.454 58.674,76.581 58.674,79.121 58.801,78.994 58.674,79.121 58.801,78.994
Vpv on Top Layer "VPV_L01_P012" (solid, remove dead copper, pour order 12): 36.195,105.029 39.751,105.029 39.751,103.124 50.673,103.124 51.054,102.743 51.054,99.187 43.561,99.187 43.561,101.092 42.799,101.854 36.195,101.854
GND on Top Layer "GND_L01_P011" (solid, remove dead copper, pour order 11): 51.445,76.17 51.475,76.2 52.705,76.2 52.705,70.358 51.435,70.358 51.435,76.2 51.562,76.2
NetD3_C on Top Layer "NETD3_C_L01_P010" (solid, remove dead copper, pour order 10): 67.818,101.6 70.231,101.6 70.231,93.726 67.818,93.726
V_PV on Top Layer "V_PV_L01_P009" (solid, remove dead copper, pour order 9): 63.373,100.838 65.151,100.838 65.151,103.632 63.373,103.632
GND on Top Layer "GND_L01_P008" (solid, remove dead copper, pour order 8): 48.006,73.215 48.069,73.279 49.276,73.279 49.276,78.613 47.879,78.613 47.879,73.343 48.006,73.215 48.069,73.279 48.387,73.279
GND on Top Layer "GND_L01_P007" (solid, remove dead copper, pour order 7): 48.006,76.073 49.276,76.073 49.276,71.374 53.594,71.374 53.594,65.913 51.054,65.913 51.054,70.358 48.006,70.358
GND on Top Layer "GND_L01_P006" (solid, remove dead copper, pour order 6): 43.942,77.597 52.959,77.597 52.959,81.153 43.942,81.153
NetD1_C on Top Layer "NETD1_C_L01_P004" (solid, remove dead copper, pour order 4): 46.355,76.073 47.625,76.073 47.625,71.247 46.609,71.247 46.609,61.468 47.244,61.468 47.244,55.372 42.799,55.372 42.799,64.77 44.069,64.77 44.069,71.882 44.196,72.009 46.355,72.009
V_PV on Top Layer "V_PV_L01_P003" (solid, remove dead copper, pour order 3): 39.116,76.327 45.847,76.327 45.847,72.517 39.116,72.517
NetD2_1 on Top Layer "NETD2_1_L01_P002" (solid, remove dead copper, pour order 2): 59.309,99.441 60.071,99.441 60.071,97.663 65.151,97.663 65.151,96.774 65.024,96.647 61.595,96.647 61.595,94.107 60.452,94.107 60.452,96.647 59.309,96.647
V_PV on Top Layer "V_PV_L01_P001" (solid, remove dead copper, pour order 1): 65.278,98.298 65.278,101.981 65.024,101.727 59.944,101.727 59.944,99.949 60.198,99.695 62.992,99.695 62.992,98.298 63.373,98.298

## Keep-outs
Top Layer:
  lines w0.15: 31.75,36.512 ccw(c35.814,36.576) 35.75,32.512 ; 31.75,36.576 31.75,118.047 cw(c35.814,117.983) 35.75,122.047 146.304,122.047 ; 35.814,32.512 146.558,32.512 ; 146.368,32.512 ccw(c146.304,36.576) 150.368,36.512 ; 146.368,122.047 cw(c146.304,117.983) 150.368,118.047 ; 150.368,36.322 150.368,117.983

## Silkscreen, mask and mechanical layers (free items; w line width, h text height)
Top Overlay:
  text "+" at 35.179,107.656 h1
  text "-" at 35.052,94.242 h1
  text "-" at 135.001,46.363 h1
  text "+" at 134.874,33.488 h1

## Text inside footprints (layer, text, board x,y; h text height)
U2: Mechanical 2 "20" at 95.631,66.675 h1 r270; Mechanical 2 "1" at 95.612,114.567 h1 r270; Mechanical 2 "21" at 110.871,66.675 h1 r270; Mechanical 2 "40" at 110.871,114.935 h1 r270